# Allegro board supply_adder.brd
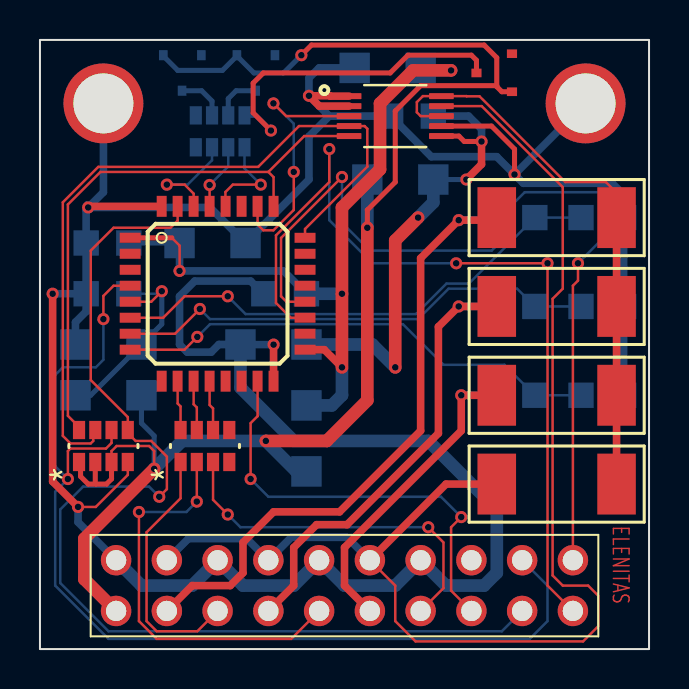
[diagram p0: board, top side]
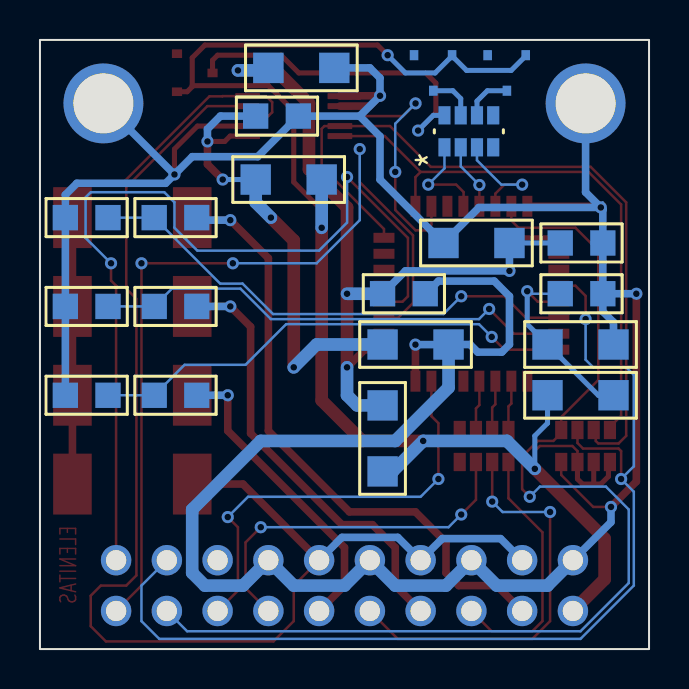
[diagram p1: board, bottom side, seen from below]

Outline 30.48 x 30.48 mm; copper layers: TOP, BOTTOM. Coordinates in mm from the lower left corner of the outline.
Outline path: rectangle 0,0 30.48,30.48

## Design rules (mm)
constraint set DEFAULT: min track width 0.127

## Placement (name value [footprint] x y rotation side)
C189  0.1uF  [0805]  4.45 17.78 180 bottom
C190  0.1uF  [0805]  4.45 20.32 180 bottom
C191  0.1uF  [0805]  13.34 17.78 180 bottom
C194  10uF  [1206]  5.08 15.24 180 bottom
C195  10uF  [1206]  6.98 20.32 0 bottom
C196  10uF  [1206]  19.05 29.08 180 bottom
C197  0.1uF  [0805]  19.69 26.67 180 bottom
C198  10uF  [1206]  13.34 15.24 180 bottom
D1  DIODE ZENER SOT23  [SOT23]  22.73 28.83 180 top
D2  DIODE ZENER SOT23  [SOT23]  10.8 28.83 270 bottom
D3  DIODE ZENER SOT23  [SOT23]  7.11 28.83 270 bottom
J21  HDR-DIL20  [HDR-DIL20-100]  3.81 1.91 90 top
L30  L-1206  [1206]  13.34 8.89 90 bottom
L31  L-1206  [1206]  5.08 12.7 180 bottom
L32  L-1206  [1206]  19.69 23.5 180 bottom
MT5  MOUNTING  [PI-HOLE]  3.18 27.3 0 top
MT6  MOUNTING  [PI-HOLE]  27.3 27.3 0 top
R93  0.006  [2512]  22.86 12.7 0 top
R94  0.006  [2512]  22.86 17.15 0 top
R95  0.006  [2512]  22.86 21.59 0 top
R96  TBD1  [0805]  24.77 21.59 180 bottom
R97  TBD2  [0805]  29.21 21.59 180 bottom
R98  TBD1  [0805]  24.77 17.15 180 bottom
R99  TBD2  [0805]  29.21 17.15 180 bottom
R100  TBD1  [0805]  24.77 12.7 180 bottom
R101  TBD2  [0805]  29.21 12.7 180 bottom
R102  0.006  [2512]  22.86 8.26 0 top
RN152  4x4.7K  [EXBV8V]  8.26 10.16 90 top
RN153  4x4.7K  [EXBV8V]  3.18 10.16 90 top
RN154  4x4.7K  [EXBV8V]  9.02 25.91 90 bottom
U75  STM32F303K8T6  [LQFP32]  8.89 17.78 0 top
U76  INA233  [VSSOP10]  17.78 26.67 0 top

## Library data of the parts
C189-C191 C194-C198 = CAP NPOL
D1-D3 = DIODE ZENER SOT23
J21 = HDR-DIL20
L30-L32 = INDUCTOR
MT5 MT6 = TEST POINT
R93-R102 = RES
RN152-RN154 = RN84-CHIP: User Part Number: PN; Tolerance: TOL
U75 = STM32F303K8T6
U76 = INA233

## Footprints (pads in the part's own frame, mm; a bottom-side part is the same pattern mirrored in y, then rotated)
0805
  rect 1.27x1.27 smd: 1(0,0) 2(2.134,0)
1206
  rect 1.524x1.524 smd: 1(0,0) 2(3.302,0)
2512
  rect 1.93x3.048 smd: 1(0,0) 2(5.994,0)
EXBV8V
  rect 0.914x0.61 smd: 1(-0.8,1.219) 2(-0.8,0.406) 3(-0.8,-0.406) 4(-0.8,-1.219) 5(0.8,-1.219) 6(0.8,-0.406) 7(0.8,0.406) 8(0.8,1.219)
HDR-DIL20-100
  round 1.524 hole 1.016: 1(0,0) 2(2.54,0) 3(0,-2.54) 4(2.54,-2.54) 5(0,-5.08) 6(2.54,-5.08) 7(0,-7.62) 8(2.54,-7.62) 9(0,-10.16) 10(2.54,-10.16) 11(0,-12.7) 12(2.54,-12.7) 13(0,-15.24) 14(2.54,-15.24) 15(0,-17.78) 16(2.54,-17.78) 17(0,-20.32) 18(2.54,-20.32) 19(0,-22.86) 20(2.54,-22.86)
LQFP32
  rect 1.05x0.5 smd: 1(-4.375,2.8) 2(-4.375,2) 3(-4.375,1.2) 4(-4.375,0.4) 5(-4.375,-0.4) 6(-4.375,-1.2) 7(-4.375,-2) 8(-4.375,-2.8) 17(4.375,-2.8) 18(4.375,-2) 19(4.375,-1.2) 20(4.375,-0.4) 21(4.375,0.4) 22(4.375,1.2) 23(4.375,2) 24(4.375,2.8)
  rect 0.5x1.05 smd: 9(-2.8,-4.375) 10(-2,-4.375) 11(-1.2,-4.375) 12(-0.4,-4.375) 13(0.4,-4.375) 14(1.2,-4.375) 15(2,-4.375) 16(2.8,-4.375) 25(2.8,4.375) 26(2,4.375) 27(1.2,4.375) 28(0.4,4.375) 29(-0.4,4.375) 30(-1.2,4.375) 31(-2,4.375) 32(-2.8,4.375)
PI-HOLE
  round 4 hole 3: 1(0,0)
SOT23
  rect 0.508x0.432 smd: 1(-0.889,0.94) 2(-0.889,-0.965) 3(0.889,0)
VSSOP10
  custom 1.24x0.3 smd: 1(-2.31,1) 2(-2.31,0.5) 3(-2.31,0) 4(-2.31,-0.5) 5(-2.31,-1) 6(2.31,-1) 7(2.31,-0.5) 8(2.31,0) 9(2.31,0.5) 10(2.31,1)

## Nets
3.3V: D1.1 D2.1 D3.1 J21.1 L30.1 L31.1 L32.2 RN153.1 RN153.2 RN153.3
GND: C189.2 C190.2 C191.2 C194.2 C195.2 C196.2 C197.2 C198.2 J21.2 J21.6 J21.10 J21.14 MT5.1 MT6.1 R97.1 R99.1 R101.1 RN153.4 U75.16(VSS_2) U75.32 U76.1 U76.2 U76.7
V1: J21.3 R95.1 R96.2
V2: J21.7 R94.1 R98.2
V3: J21.11 R93.1 R100.2
VDD_MCU: C190.1 C191.1 C195.1 C196.1 L30.2 U75.1 U75.17
VDDA_MCU: C189.1 C194.1 L31.2 U75.5
ADC1: R96.1 R97.2 U75.6
ADC2: R98.1 R99.2 U75.7
ADC3: R100.1 R101.2 U75.8
ALERT: U75.26 U76.3
BOOTMODE: J21.17 RN153.5 U75.31
DAC1: RN152.8 U75.10
DAC2: RN152.7 U75.11
DAC3: RN152.6 U75.12
ENABLE: J21.15 U75.15
FB1: J21.5 RN152.1
FB2: J21.9 RN152.2
FB3: J21.13 RN152.3
I2C-SCL: RN153.8 U75.25 U76.5
I2C-SDA: RN153.7 U75.24 U76.4
LED1: RN154.3 U75.30
LED2: RN154.2 U75.29
LED3: RN154.1 U75.28
RESETN: J21.18 RN153.6 U75.4
STATUS: U75.13
UART_RXD: J21.20 U75.20
UART_TXD: J21.19 U75.19
V: J21.4 J21.8 J21.12 R102.1 U76.9
VS_ADC: C197.1 C198.1 L32.1 U76.6(VS)
VX: R93.2 R94.2 R95.2 R102.2 U76.8 U76.10
N17108839: D1.3(K) RN154.8
N17108848: D2.3(K) RN154.7
N17108851: D3.3(K) RN154.6

Pads without a net: D1 2; D2 2; D3 2; J21 16; RN152 4 5; RN154 4 5; U75 2 3 9 14 18 21 22 23 27

## Via types
v1: diameter 0.61, hole 0.33, TOP to BOTTOM, 45 vias

## Routing (per net, layer and track width the routed paths; a pad name or vN(x,y) marks a point on that pad's centre or on a via; arc(x,y) is an arc through that point)
3.3V: length 80.2
  TOP w0.127: v1(5.71,9.02) 5.71,9.91 5.46,10.16 3.84,10.16 3.58,9.91 RN153.3
  TOP w0.254: 2.79,8.26 3.33,8.26 3.58,8.51 RN153.3 ; 2.79,8.26 2.77,8.28 RN153.2 ; 2.79,8.26 2.41,8.26 2.03,8.64 2.03,9.28 RN153.1 ; v1(16.38,21.08) 16.38,21.97 17.78,23.37 17.78,26.92 19.05,28.19 22.86,28.19 ; D1.1 23.11,27.89 22.86,28.14 22.86,28.19 ; 22.86,28.19 22.86,29.59 22.23,30.23 13.59,30.23 v1(13.08,29.72)
  TOP w0.635: v1(16.38,21.08) 16.38,12.45 14.35,10.41 v1(11.3,10.41) ; J21.1 2.22,3.49 2.22,5.52 v1(5.71,9.02)
  BOTTOM w0.254: D2.1 9.86,29.68 ; 9.86,29.68 10.71,28.83 12.19,28.83 v1(13.08,29.72) ; 9.86,29.68 9.13,28.96 6.9,28.96 6.17,29.68 D3.1 ; v1(5.71,9.02) 5.71,10.67 5.08,11.3 L31.1
  BOTTOM w0.635: v1(16.38,21.08) L32.2 ; v1(5.71,9.02) 7.11,10.41 v1(11.3,10.41) 12.83,8.89 L30.1
GND: length 157.2
  TOP w0.127: RN153.4 4.39,8.71 2.79,7.11 v1(1.91,7.11) ; 2.47,22.15 v1(2.41,22.1)
  TOP w0.254: U76.7 22.6,26.17 23.75,25.02 v1(23.75,23.75)
  TOP w0.381: U76.2 13.98,27.17 v1(13.46,27.69) 14.52,27.69 14.53,27.67 U76.1 ; v1(0.64,17.78) 0.64,8.38 v1(1.91,7.11) ; U75.32 2.47,22.15 ; U75.16 v1(11.69,15.23)
  BOTTOM w0.127: 2.31,22.35 2.41,22.25 v1(2.41,22.1)
  BOTTOM w0.254: 2.29,16.87 2.31,16.89
  BOTTOM w0.381: v1(23.75,23.75) 24.19,23.31 28.63,23.31 29.21,22.73 R97.1 R99.1 R101.1 ; v1(23.75,23.75) 22.86,24.64 19.58,24.64 C197.2 14.48,26.67 ; v1(23.75,23.75) MT6.1 ; 14.48,26.67 v1(13.46,27.69) 13.46,28.58 13.97,29.08 C196.2 ; 14.48,26.67 13.46,25.65 13.46,23.5 C195.2 8.51,22.1 2.44,22.1 2.31,21.97 ; C194.2 1.78,16.36 2.29,16.87 ; 2.31,21.97 C190.2 C189.2 ; 2.31,21.97 2.31,22 v1(2.41,22.1) 3.18,22.86 MT5.1 ; v1(0.64,17.78) C189.2 ; C189.2 2.31,16.89 ; J21.2 1.91,6.35 v1(1.91,7.11) ; v1(11.69,15.23) 10.04,15.23 C198.2 8.95,15.24 8.57,14.86 7.37,14.86 6.98,15.24 6.98,17.65 7.75,18.41 10.54,18.41 11.18,17.78 C191.2
  BOTTOM w0.635: C198.2 10.03,13.08 12.7,10.41 19.43,10.41 22.86,6.98 22.86,3.81 22.23,3.18 20.32,3.18 J21.14 17.78,3.18 15.24,3.18 J21.10 12.7,3.18 10.16,3.18 J21.6 7.62,3.18 5.08,3.18 J21.2
V1: length 32.3
  TOP w0.381: R95.1 22.73,21.46 v1(20.95,21.46) 19.05,19.56 19.05,10.92 14.99,6.86 11.69,6.86 10.16,5.33 10.16,3.81 9.52,3.18 7.62,3.18 J21.3
  BOTTOM w0.381: R96.2 22.5,21.46 v1(20.95,21.46)
V2: length 23.7
  TOP w0.381: J21.7 12.7,3.18 12.7,5.08 13.84,6.22 15.37,6.22 19.94,10.8 19.94,16.13 v1(20.95,17.15) R94.1
  BOTTOM w0.381: R98.2 v1(20.95,17.15)
V3: length 17.1
  TOP w0.381: J21.11 15.24,3.18 15.24,5.08 21.08,10.92 v1(21.08,12.7) R93.1
  BOTTOM w0.381: v1(21.08,12.7) R100.2
VDD_MCU: length 42.5
  TOP w0.127: v1(6.98,18.92) 6.98,20.19 6.6,20.58
  TOP w0.254: U75.1 6.6,20.58
  TOP w0.381: U75.17 14.23,14.98 v1(15.11,14.1)
  TOP w0.635: v1(15.11,14.1) v1(15.11,17.78) 15.11,22.1 17.02,24 17.02,27.3 18.67,28.96 v1(20.57,28.96)
  BOTTOM w0.254: C190.1 C195.1 6.73,20.57 6.48,20.57
  BOTTOM w0.381: C191.1 12.19,18.92 v1(6.98,18.92) C195.1
  BOTTOM w0.635: v1(20.57,28.96) 19.18,28.96 C196.1 ; L30.2 14.61,12.19 15.11,12.7 v1(15.11,14.1) ; C191.1 v1(15.11,17.78)
VDDA_MCU: length 10.9
  TOP w0.127: v1(6.1,17.91) 5.57,17.38 U75.5
  BOTTOM w0.127: v1(6.1,17.91) 5.97,17.78 C189.1
  BOTTOM w0.254: v1(6.1,17.91) 6.1,16.26 C194.1 2.54,12.7 L31.2
ADC1: length 25.4
  TOP w0.127: v1(9.4,17.65) 7.24,17.65 6.17,16.58 U75.6
  BOTTOM w0.127: v1(9.4,17.65) 10.29,16.76 18.82,16.76 20.34,18.29 21.46,18.29 R96.1 R97.2
ADC2: length 24.3
  TOP w0.127: U75.7 6.76,15.78 v1(8,17.02)
  BOTTOM w0.127: R99.2 R98.1 23.88,18.03 20.45,18.03 18.92,16.51 8.51,16.51 v1(8,17.02)
ADC3: length 24.6
  TOP w0.127: v1(7.87,15.62) 7.23,14.98 U75.8
  BOTTOM w0.127: v1(7.87,15.62) 8.51,16.26 18.16,16.26 20.19,14.22 23.24,14.22 R100.1 R101.2
ALERT: length 13.1
  TOP w0.127: U75.26 10.89,21.24 11.18,20.95 11.68,20.95 12.7,21.97 v1(12.7,23.88) ; v1(11.68,27.3) 12.32,26.67 U76.3
  BOTTOM w0.127: v1(12.7,23.88) 12.7,26.29 v1(11.68,27.3)
BOOTMODE: length 54.1
  TOP w0.127: U75.31 6.89,21.44 6.53,21.08 3.68,21.08 2.54,19.94 2.54,13.46 4.39,11.61 RN153.5 4.39,10.81 4.79,10.41 5.57,10.41 6.35,9.63 6.35,8 v1(5.97,7.62)
  BOTTOM w0.127: v1(5.97,7.62) 5.46,8.13 2.16,8.13 1.02,6.98 1.02,3.3 3.43,0.89 23.11,0.89 J21.17
DAC1: length 2.5
  TOP w0.127: U75.10 6.89,12.29 7.04,12.14 RN152.8
DAC2: length 2.5
  TOP w0.127: U75.11 7.69,12.25 7.85,12.09 RN152.7
DAC3: length 2.5
  TOP w0.127: U75.12 8.49,12.21 8.66,12.04 RN152.6
ENABLE: length 21.7
  TOP w0.127: v1(10.54,8.51) 10.54,11.3 10.89,11.65 U75.15 ; v1(21.08,6.6) 20.57,6.1 20.57,2.92 J21.15
  BOTTOM w0.127: v1(10.54,8.51) 11.43,7.62 20.07,7.62 v1(21.08,6.6)
FB1: length 12.9
  TOP w0.127: RN152.1 7.04,7.54 5.33,5.84 5.33,1.4 5.84,0.89 7.87,0.89 J21.5
FB2: length 20.5
  TOP w0.127: J21.9 12.57,0.51 5.84,0.51 4.95,1.4 v1(4.95,6.86) ; v1(7.85,7.38) RN152.2
  BOTTOM w0.127: v1(4.95,6.86) 7.33,6.86 v1(7.85,7.38)
FB3: length 18.2
  TOP w0.127: v1(19.43,6.1) 20.19,5.33 20.19,3.05 J21.13 ; RN152.3 8.66,7.47 v1(9.4,6.73)
  BOTTOM w0.127: v1(9.4,6.73) 10.03,6.1 v1(19.43,6.1)
I2C-SCL: length 28.8
  TOP w0.127: U75.25 11.69,23.62 11.43,23.88 ; 11.43,23.88 3.03,23.88 1.4,22.25 1.4,11.67 1.96,11.11 RN153.8 ; 11.43,23.88 13.22,25.67 U76.5
I2C-SDA: length 37.6
  TOP w0.127: RN153.7 2.67,10.86 2.67,10.41 2.54,10.29 1.52,10.29 1.14,10.67 1.14,22.35 2.92,24.13 10.92,24.13 12.96,26.17 U76.4 16.25,26.17 16.38,26.04 16.38,24.14 13.26,21.02 U75.24
LED1: length 5.6
  TOP w0.127: U75.30 7.69,22.79 7.24,23.24 v1(6.35,23.24)
  BOTTOM w0.127: RN154.3 8.61,24.46 7.39,23.24 v1(6.35,23.24)
LED2: length 3.3
  TOP w0.127: U75.29 v1(8.49,23.22)
  BOTTOM w0.127: RN154.2 9.42,24.16 v1(8.49,23.22)
LED3: length 4.8
  TOP w0.127: v1(11.05,23.24) 9.65,23.24 9.28,22.87 9.28,22.16 U75.28
  BOTTOM w0.127: RN154.1 10.24,24.05 v1(11.05,23.24)
RESETN: length 52.6
  TOP w0.127: v1(1.4,8.51) 1.4,9.91 1.52,10.03 3.3,10.03 3.58,10.31 RN153.6 ; U75.4 3.68,18.18 3.18,17.67 v1(3.18,16.51)
  BOTTOM w0.127: J21.18 25.4,3.18 25.4,1.4 24.51,0.51 3.43,0.51 0.76,3.18 0.76,7.87 v1(1.4,8.51) 0.76,9.14 0.76,13.72 1.14,14.1 2.79,14.1 3.18,14.48 v1(3.18,16.51)
UART_RXD: length 45.3
  TOP w0.127: U75.20 12.34,17.38 12.07,17.65 12.07,20.57 v1(15.11,23.62) ; J21.20 26.67,18.18 26.92,18.44 v1(26.92,19.3)
  BOTTOM w0.127: v1(26.92,19.3) 28.19,20.57 28.19,22.61 27.94,22.86 24.26,22.86 23.75,22.35 23.75,21.08 22.61,19.94 16.51,19.94 15.11,21.34 v1(15.11,23.62)
UART_TXD: length 43.9
  TOP w0.127: v1(20.83,19.3) v1(25.4,19.3) 25.4,3.18 J21.19 ; v1(14.48,25.02) 14.48,23.37 11.81,20.7 11.81,17.32 12.55,16.58 U75.19
  BOTTOM w0.127: v1(20.83,19.3) 16.64,19.3 14.48,21.46 v1(14.48,25.02)
V: length 66
  TOP w0.127: J21.12 17.78,3.18 17.78,1.4 18.8,0.38 27.18,0.38 27.94,1.14 27.94,2.67 27.43,3.18 26.16,3.18 25.65,3.68 25.65,17.53 26.16,18.03 26.16,23.11 22.11,27.17 U76.9
  TOP w0.381: R102.1 20.32,8.26 J21.12
  BOTTOM w0.381: J21.12 15.37,5.59 12.57,5.59 J21.8 10.35,5.52 7.43,5.52 J21.4
VS_ADC: length 24.4
  TOP w0.254: U76.6 20.96,25.67 21.23,25.4 v1(22.1,25.4)
  TOP w0.381: v1(22.1,25.4) 22.1,24.26 v1(21.34,23.5)
  TOP w0.635: v1(18.92,21.59) 17.78,20.45 v1(17.78,14.1)
  BOTTOM w0.254: v1(21.34,23.5) L32.1
  BOTTOM w0.381: C197.1 21.45,26.67 22.1,26.02 v1(22.1,25.4)
  BOTTOM w0.635: L32.1 19.69,22.35 v1(18.92,21.59) ; C198.1 16.64,15.24 v1(17.78,14.1)
VX: length 28.5
  TOP w0.127: U76.8 19.05,26.67 18.86,26.86 18.86,27.37 19.16,27.67 U76.10 21.34,27.67 21.35,27.66 22,27.66 26.29,23.37 28.32,23.37 28.85,22.83 R95.2
  TOP w0.381: R102.2 R93.2 R94.2 R95.2
N17108839: length 16.9
  TOP w0.254: D1.3 21.84,29.46 21.59,29.72 18.41,29.72 17.53,28.83 11.18,28.83 10.67,28.32 10.67,26.84 v1(11.56,25.95)
  BOTTOM w0.254: RN154.8 10.8,26.71 v1(11.56,25.95)
N17108848: length 2.4
  BOTTOM w0.254: D2.3 9.82,27.94 9.42,27.55 RN154.7
N17108851: length 2.4
  BOTTOM w0.254: D3.3 8.09,27.94 8.61,27.42 RN154.6

## Text on the board
TOP: ELENITAS
